# Altium PCB LPDB.PcbDoc
Units mil, origin at the board's own origin, x right, y up, seen from the top; angles counter-clockwise.
Board outline 1968.5 x 2450.79 mil, 2 copper layers (Top Layer, Bottom Layer), stack 65.792 mil thick; 34 components, 41 nets, 185 pads, 198 vias.
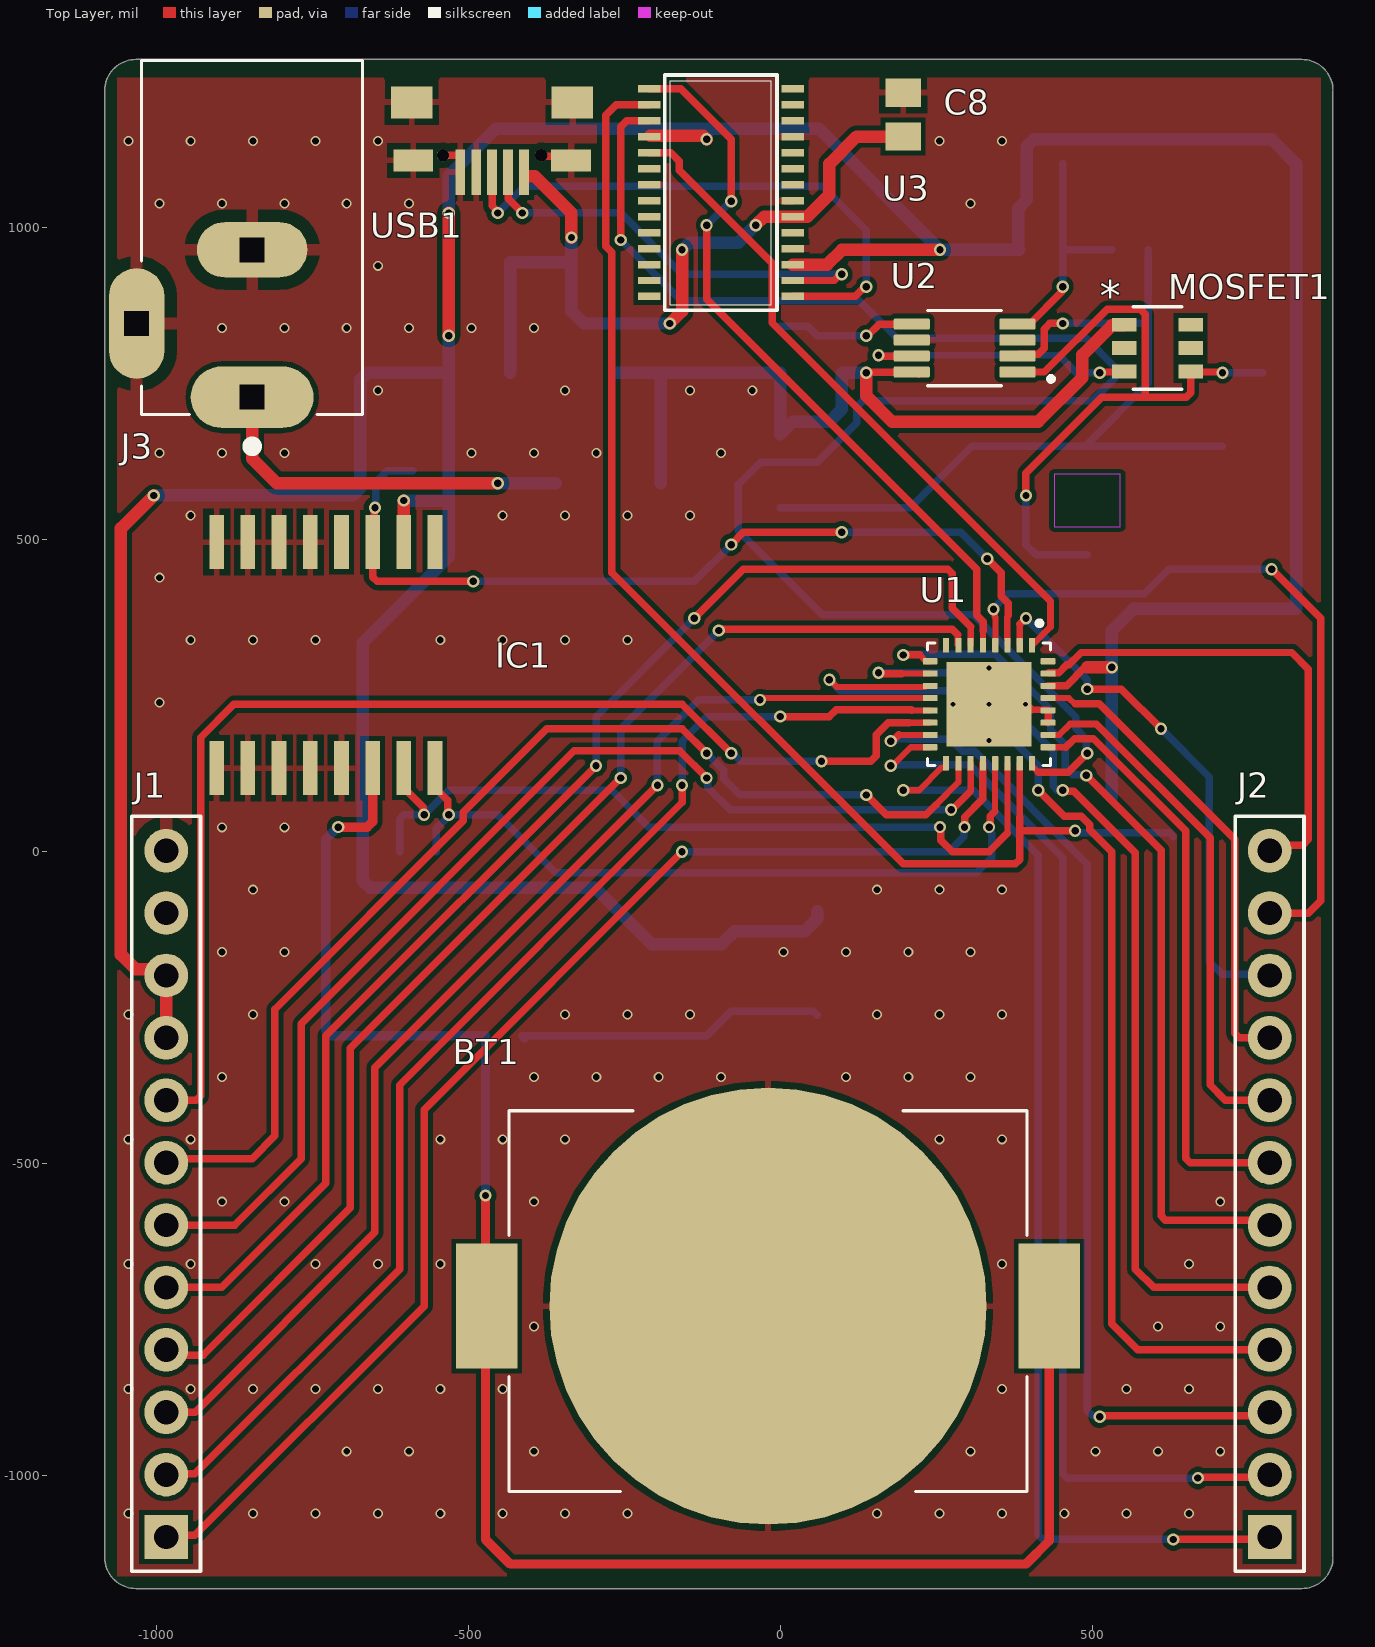
[diagram p0: Top Layer view]
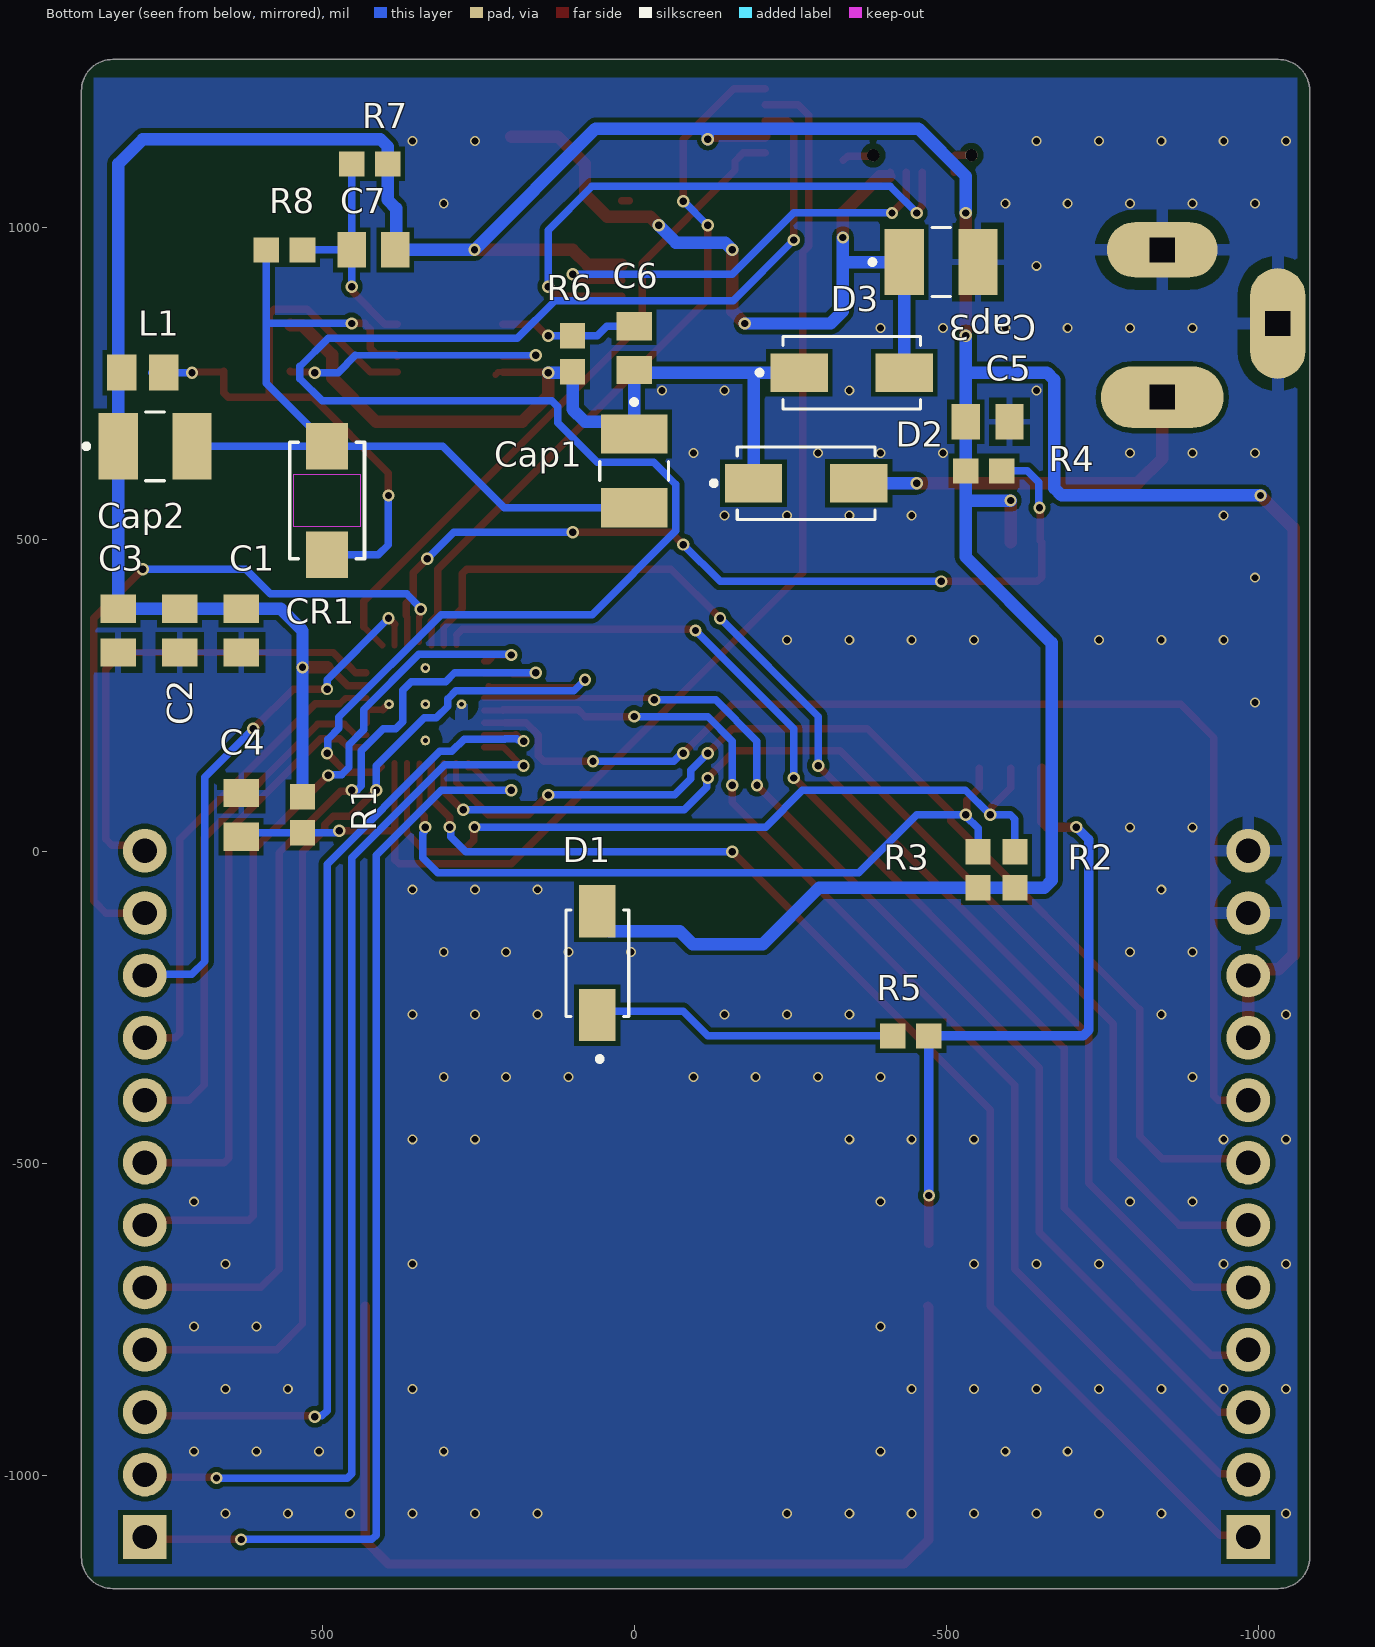
[diagram p1: Bottom Layer view, seen from below]
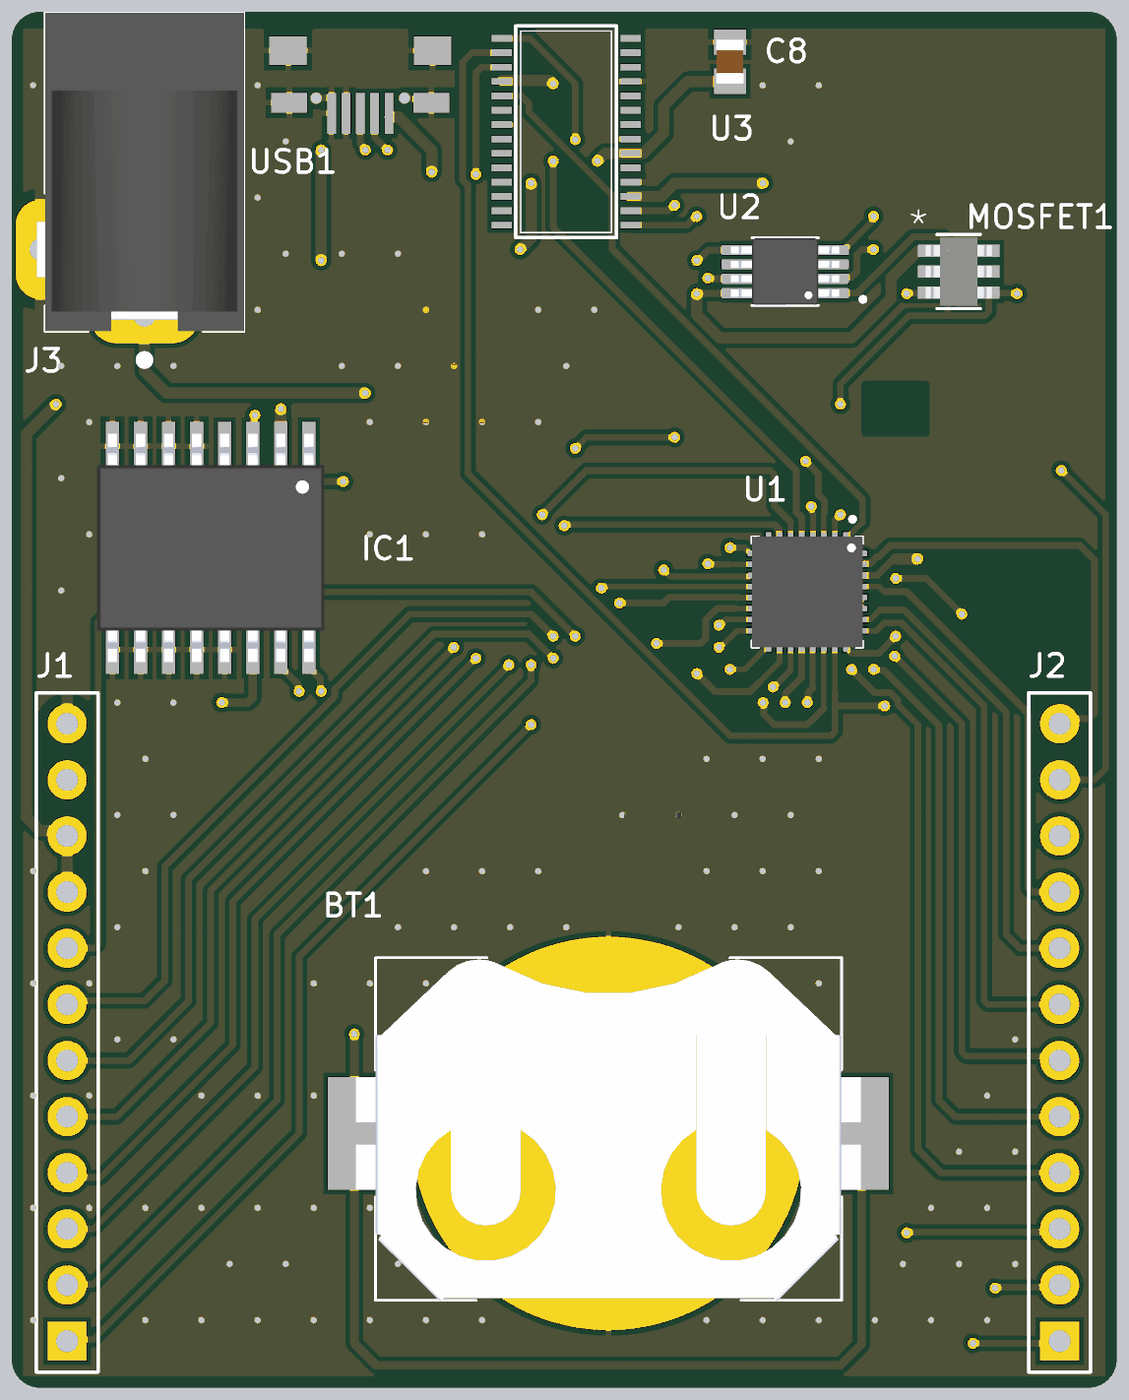
[diagram p2: 3D render of the assembled board from above, using the file's embedded part models]
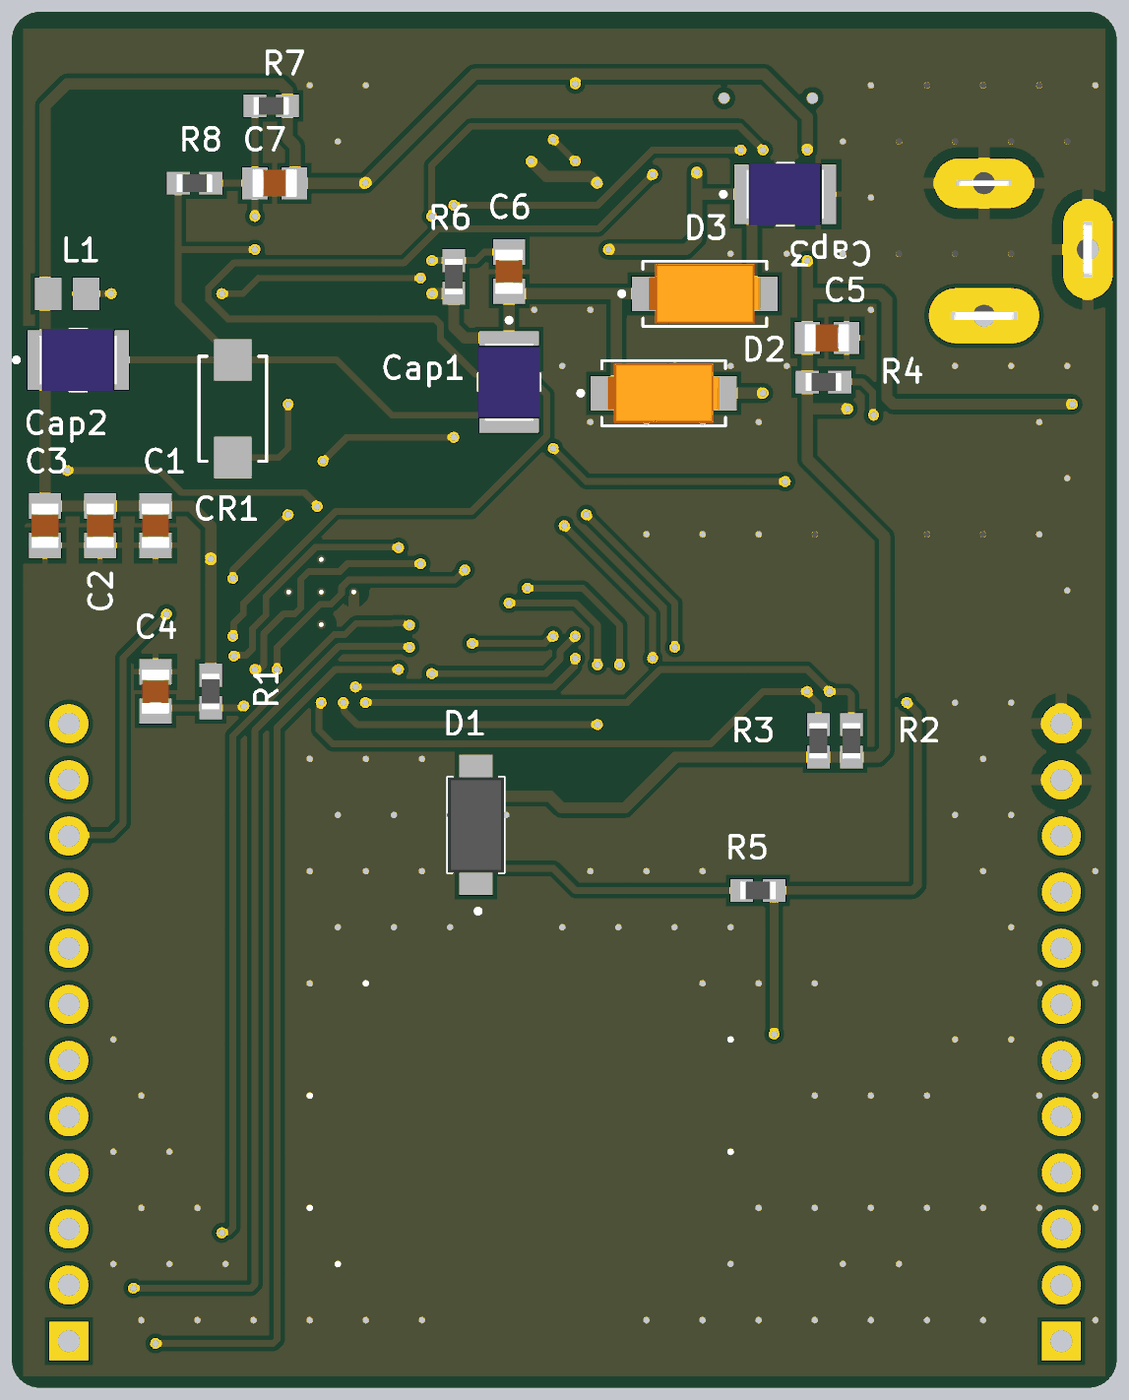
[diagram p3: 3D render of the assembled board from below, using the file's embedded part models]

## Layer stack, top to bottom
Top Solder: solder mask 0.4, Solder Resist, Dk 3.5
Top Layer: signal copper 1.4
Dielectric 1: dielectric 62.992, FR-4, Dk 3.8
Bottom Layer: signal copper 1.4
Bottom Solder: solder mask 0.4, Solder Resist, Dk 3.5

## Board outline
-1082.68,-1131.1 -1082.68,1219.69 cw(c-1032.68,1219.69) -1032.68,1269.69 835.83,1269.69 cw(c835.83,1219.69) 885.83,1219.69 885.83,-1131.1 cw(c835.83,-1131.1) 835.83,-1181.1 -1032.68,-1181.1 cw(c-1032.68,-1131.1)

## Design rules (kind name [scope] priority, off if disabled: settings)
Clearance [All] p1: gap=7.87 ignorepadtopadclearanceinfootprint=FALSE except(5: SMDPad-SMDPad)
HoleSize [All] p1: absolutevalues=TRUE maxlimit=248.03 minlimit=7.87 maxpercent=80.000 minpercent=20.000
HoleToHoleClearance [All] p1: gap=19.68 allowstackedmicrovias=TRUE
MinimumSolderMaskSliver [All] p1: minsoldermaskwidth=3.94
PolygonConnect [All] p1: thpad.connectstyle=Relief thpad.reliefconductorwidth=19.68 thpad.reliefentries=4 thpad.polygonreliefangle="90 Angle" thpad.airgapwidth=19.68 smdpad.connectstyle=Relief smdpad.reliefconductorwidth=9.84 smdpad.reliefentries=4 smdpad.polygonreliefangle="90 Angle" smdpad.airgapwidth=9.84 via.connectstyle=Direct via.reliefconductorwidth=10 via.reliefentries=4 via.polygonreliefangle="90 Angle" via.airgapwidth=10
RoutingVias [All] p1: holewidth=11.81 width=19.68 viastyle="Through Hole" minholewidth=11.81 minwidth=19.68 maxholewidth=11.81 maxwidth=19.68
SilkToSilkClearance [All] p1: silktosilkclearance=5.91
SilkToSolderMaskClearance [IsPad] p1: minsilkscreentomaskgap=3.94 clearancetoexposedcopper=TRUE
SolderMaskExpansion [All] p1: expansion=1.5 istentingtop=FALSE
Width Width_power [InNetClass('Power')] p1: maxlimit=25 minlimit=10 preferedwidth=20
Width [InNetClass('Other')] p2: maxlimit=15 minlimit=10 preferedwidth=12
25 further rules are at their usual default settings.

## Classes and differential pairs
component class "USB Bridge": C8 U3 USB1
component class RTC: BT1 C5 D1 IC1 R2 R3 R4 R5
component class Power: C6 C7 Cap1 Cap2 Cap3 CR1 D2 D3 J3 L1 MOSFET1 R6 R7 R8 U2
component class MCU: C1 C2 C3 C4 J1 J2 R1 U1

## Components (designator, comment, footprint, x,y, rotation, side; value= is the part's Value field where it differs from the comment)
BT1 "BAT-HLD-001" BAT_BAT-HLD-001 -19.68,-728.35 r180 top
C1 "Cap" Cap_0805 629.92,354.33 r90 bottom
C2 "Cap" Cap_0805 728.35,354.33 r90 bottom
C3 "Cap" Cap_0805 826.77,354.33 r90 bottom
C4 "Cap" Cap_0805 629.92,59.06 r90 bottom
C5 "Cap" Cap_0805 -566.5,688.98 r180 bottom
C6 "Cap" Cap_0805 0,807.09 r270 bottom
C7 "Cap" Cap_0805 417.76,964.57 r180 bottom
C8 "Cap" Cap_0805 196.85,1181.1 r270 top
Cap1 "Polarized_Cap" CAP_B3528 0,610.24 r270 bottom
Cap2 "Polarized_Cap" CAP_B3528 767.72,649.61 r180 bottom
Cap3 "Polarized_Cap" CAP_B3528 -492.13,944.88 r180 bottom
CR1 "SS12-E3/61T" SMA(DO-214AC)_VIS 492.13,562.73 r90 bottom
D1 "Diode" Diode_SMD 59.06,-183.82 r90 bottom
D2 "Diode" DO-214AC -275.59,590.55 r180 bottom
D3 "Diode" DO-214AC -348.82,767.72 r180 bottom
IC1 "DS3231" SO16W -728.35,314.96 r180 top
J1 "DW-12-13-T-S-827" CONN12-07-F-S-200_SAI -984.25,-1098.43 r90 top
J2 "DW-12-13-T-S-827" CONN12-07-F-S-200_SAI 784.25,-1098.42 r90 top
J3 "PJ-002B" CUI_PJ-002B -846.46,728.35 r90 top
L1 "MLZ2012N220LT000" "IND - 0805" 787.4,767.72 r0 bottom value="22 μH"
MOSFET1 "FDC5614P" TSOT23-6_419BL_ONS 604.43,807.09 r0 top
R1 "Resistor" Res_0603 531.5,59.06 r90 bottom
R2 "Resistor" Res_0603 -610.24,-28.94 r270 bottom
R3 "Resistor" Res_0603 -551.18,-28.94 r270 bottom
R4 "Resistor" Res_0603 -560.43,610.24 r180 bottom
R5 "Resistor" Res_0603 -443.5,-295.28 r0 bottom
R6 "Resistor" Res_0603 98.43,797.83 r270 bottom
R7 "Resistor" Res_0603 423.82,1102.36 r0 bottom
R8 "Resistor" Res_0603 560.43,964.57 r180 bottom
U1 "MSP430G2x53 QFN-32" MSP430G2x53_QFN 334.65,236.22 r270 top
U2 "LM3485MM" SOP65P490X110-8N 295.28,807.09 r180 top
U3 "PL2303HX" TSSOP28 -91.06,1066.73 r0 top
USB1 "USB_Socket" "MICRO QTZB5.0" -461.81,1089.17 r180 top

## Footprints (in the part's own frame and the unit in brackets; to place one, negate y for a bottom-side part, rotate by r counter-clockwise, add the part's x,y. Pads: shape width x height; smd on the part's side, far side on the other; paste and mask are expansions set on the pad)
BAT_BAT-HLD-001 [mm]
  round 17.8 smd paste-10: N-(0,0)
  rect 2.5x5.1 smd: P+(-11.45,0) P+(11.45,0)
  silkscreen extent -10.55,-7.95 10.55,7.55, body extent -11.43,-7.87 11.43,7.62, height 4.32
Cap_0805 [mm]
  rect 1.15x1.45 smd: 1(-0.889,0) 2(0.889,0)
  body extent -1,-0.62 1.01,0.63, height 0.94
CAP_B3528 [mm]
  rect 1.6x2.7 smd: 1(-1.5,0) 2(1.5,0)
  silkscreen extent -2.9,-1.4 0.38,1.4, body extent -1.75,-1.4 1.75,1.4, height 1.9
CONN12-07-F-S-200_SAI [mil]
  rect 70x70 hole 39: 1(0,0)
  round 70 hole 39: 2(100,0) 3(200,0) 4(300,0) 5(400,0) 6(500,0) 7(600,0) 8(700,0) 9(800,0) 10(900,0) 11(1000,0) 12(1100,0)
  silkscreen extent -55,-55 1155,55
CUI_PJ-002B [mm]
  oval 2.5x5 hole 1 square: 1(0,0)
  oval 2.25x4.5 hole 1 square: 2(6,0)
  oval 4.5x2.25 hole 1 square: 3(3,4.7)
  silkscreen extent -2.2,-4.5 13.7,4.5, body extent -0.7,-4.5 13.7,4.9, height 11
Diode_SMD [mm]
  rect 2.12x1.5 smd: A(2.242,0) C(-1.988,0)
  silkscreen extent -3.87,-1.28 2.29,1.28, body extent -2.44,-1.28 2.7,1.28, height 1.15
DO-214AC [mm]
  rect 2.33x1.56 smd: A(2.14,0) C(-2.14,0)
  silkscreen extent -3.85,-1.48 2.8,1.48, body extent -2.53,-1.35 2.52,1.35, height 2.37
"IND - 0805" [mm]
  rect 1.2x1.47 smd: 1(-0.86,0) 2(0.86,0)
"MICRO QTZB5.0" [mm] "MICRO QTZB5.0"
  rect 0.4x1.85 smd: 1(-1.3,0) 2(-0.65,0) 3(0,0) 4(0.65,0) 5(1.3,0)
  round 0.5 hole 0.5 paste+0 mask+0: NC1(-2,-0.685) NC2(2,-0.685)
  rect 1.625x0.9 smd: SH1(-3.213,-0.475) SH2(3.213,-0.475)
  rect 1.69x1.3 smd: SH3(-3.27,-2.835) SH6(3.27,-2.835)
MSP430G2x53_QFN [mm] "32 PIN QFN."
  rrect25% 0.6x0.25 smd mask+0: 1(-2.4,1.75) 2(-2.4,1.25) 3(-2.4,0.75) 4(-2.4,0.25) 5(-2.4,-0.25) 6(-2.4,-0.75) 7(-2.4,-1.25) 8(-2.4,-1.75) 17(2.4,-1.75) 18(2.4,-1.25) 19(2.4,-0.75) 20(2.4,-0.25) 21(2.4,0.25) 22(2.4,0.75) 23(2.4,1.25) 24(2.4,1.75)
  rrect25% 0.25x0.6 smd mask+0: 9(-1.75,-2.4) 10(-1.25,-2.4) 11(-0.75,-2.4) 12(-0.25,-2.4) 13(0.25,-2.4) 14(0.75,-2.4) 15(1.25,-2.4) 16(1.75,-2.4) 25(1.75,2.4) 26(1.25,2.4) 27(0.75,2.4) 28(0.25,2.4) 29(-0.25,2.4) 30(-0.75,2.4) 31(-1.25,2.4) 32(-1.75,2.4)
  rect 3.45x3.45 smd paste-3 mask+0: 33(0,0)
  round 0.4 hole 0.2 mask+0: 34(0,0) 35(0,1.475) 36(-1.475,0) 37(0,-1.475) 38(1.475,0)
  silkscreen extent -3.39,-2.5 2.5,2.5, body extent -2.5,-2.5 2.5,2.5, height 0.99
Res_0603 [mm]
  rect 1.04x1.02 smd: 1(-0.735,0) 2(0.735,0)
  body extent -0.8,-0.4 0.8,0.4, height 0.55
SMA(DO-214AC)_VIS [mil]
  rect 74x67 smd paste+0 mask+0: 1(-86.88,0) 2(86.87,0)
  Top Layer keep-out region: -42,-53 -42,53 42,53 42,-53
  Keep-Out Layer region: -42,-53 -42,53 42,53 42,-53
  silkscreen extent -94,-60 94,60
SO16W [mm]
  rect 0.6x2.2 smd: 1(-4.445,-4.6) 2(-3.175,-4.6) 3(-1.905,-4.6) 4(-0.635,-4.6) 5(0.635,-4.6) 6(1.905,-4.6) 7(3.175,-4.6) 8(4.445,-4.6) 9(4.445,4.6) 10(3.175,4.6) 11(1.905,4.6) 12(0.635,4.6) 13(-0.635,4.6) 14(-1.905,4.6) 15(-3.175,4.6) 16(-4.445,4.6)
  body extent -5.15,-5.16 5.15,5.16, height 2.65
SOP65P490X110-8N [mm]
  rrect25% 1.47x0.455 smd: 1(-2.15,0.975) 2(-2.15,0.325) 3(-2.15,-0.325) 4(-2.15,-0.975) 5(2.15,-0.975) 6(2.15,-0.325) 7(2.15,0.325) 8(2.15,0.975)
  silkscreen extent -3.62,-1.54 1.5,1.54, body extent -2.45,-1.5 2.45,1.5, height 1.1
TSOT23-6_419BL_ONS [mil]
  rect 39.5x22 smd paste+0 mask+0: 1(-53.25,37.4) 2(-53.25,0) 3(-53.25,-37.4) 4(53.25,-37.4) 5(53.25,0) 6(53.25,37.4)
  silkscreen extent -38,-66 38,66, body extent -59,-61 59,61, height 43
TSSOP28 [mil]
  rect 36x12 smd: 1(-119.01,155.71) 2(-119.01,130.12) 3(-119.01,104.53) 4(-119.01,78.94) 5(-119.01,53.35) 6(-119.01,27.76) 7(-119.01,2.17) 8(-119.01,-23.43) 9(-119.01,-49.02) 10(-119.01,-74.61) 11(-119.01,-100.2) 12(-119.01,-125.79) 13(-119.01,-151.38) 14(-119.01,-176.97) 15(110.74,-176.97) 16(110.74,-151.38) 17(110.74,-125.79) 18(110.74,-100.2) 19(110.74,-74.61) 20(110.74,-49.02) 21(110.74,-23.43) 22(110.74,2.17) 23(110.74,27.76) 24(110.74,53.35) 25(110.74,78.94) 26(110.74,104.53) 27(110.74,130.12) 28(110.74,155.71)
  silkscreen extent -94,-199 86,178

## Part data
BT1: "Battery Retainer Coin, 20.0mm 1 Cell SMD (SMT) Tab", Package=None, Availability=Unavailable, MP=BAT-HLD-001, Price=None
C1 C2: Capacitance="47 µF"
C3: Capacitance=100nF
C4: Capacitance="1 nF"
C5: Capacitance=1.0μF
CR1: "No Description Available", Mfr_Name=Vishay
IC1: "Real Time Clock (RTC) IC Clock/Calendar - IÂ²C, 2-Wire Serial 8-SOIC (0.154, 3.90mm Width)", Package="SOIC-16 Maxim Integrated", Availability="In Stock", Check_prices=https://www.snapeda.com/parts/DS3231/Maxim+Integrated/view-part/?ref=eda, MF="Maxim Integrated", MP=DS3231, Price=None, Purchase-URL=https://pricing.snapeda.com/search/part/DS3231/?ref=eda, SnapEDA_Link=https://www.snapeda.com/parts/DS3231/Maxim+Integrated/view-part/?ref=snap
J1 J2: "No Description Available", Mfr_Name="Samtec Inc", RefDes=RefDes, Type=Type
J3: "2.5 x 6.5 mm, 2.5 A, Horizontal, Through Hole, Dc Power Jack Connector", Package=None, Availability="In Stock", Check_prices=https://www.snapeda.com/parts/PJ-002B/CUI+Devices/view-part/?ref=eda, CUI_purchase_URL=https://www.cuidevices.com/product/interconnect/connectors/dc-power-connectors/jacks/pj-002b?utm_source=snapeda.com&utm_medium=referral&utm_campaign=snapedaBOM, MF="CUI Devices", MP=PJ-002B, Price=None, Purchase-URL=https://pricing.snapeda.com/search/part/PJ-002B/?ref=eda, SnapEDA_Link=https://www.snapeda.com/parts/PJ-002B/CUI+Devices/view-part/?ref=snap
L1: "22ÂµH Shielded Multilayer Inductor 300mA 670mOhm 0805 (2012 Metric)", Package="2012 Bourns", Availability="In Stock", Check_prices=https://www.snapeda.com/parts/MLZ2012N220LT000/TDK/view-part/?ref=eda, MF=TDK, MP=MLZ2012N220LT000, Price=None, Purchase-URL=https://pricing.snapeda.com/search/part/MLZ2012N220LT000/?ref=eda, SnapEDA_Link=https://www.snapeda.com/parts/MLZ2012N220LT000/TDK/view-part/?ref=snap
MOSFET1: "No Description Available", Mfr_Name=onsemi, RefDes=RefDes, Type=Type
R2 R3: Resistance=2.6kΩ
R4: Resistance=4.7kΩ
R5: Resistance=200Ω
U1: "QFN-32-EP(5x5) Microcontroller Units (MCUs/MPUs/SOCs) ROHS. Texas Instruments.", Package=None, Availability=Unavailable, ComponentLink1Description=LSCS, ComponentLink1URL=https://www.lcsc.com/product-detail/Microcontroller-Units-MCUs-MPUs-SOCs_Texas-Instruments-MSP430G2553IRHB32R_C27832.html, MP=MSP430G2553IRHB32R, Price=None
U2: "4.5-35V, Hysteretic Non-Synchronous PFET Buck Controller", Package="VSSOP-8 Texas Instruments", Availability="In Stock", Check_prices=https://www.snapeda.com/parts/LM3485MMX/NOPB/Texas+Instruments/view-part/?ref=eda, MF="Texas Instruments", MP=LM3485MMX/NOPB, Price=None, Purchase-URL=https://pricing.snapeda.com/search?q=LM3485MMX/NOPB&ref=eda, SnapEDA_Link=https://www.snapeda.com/parts/LM3485MMX/NOPB/Texas+Instruments/view-part/?ref=snap
U3: "USB to RS232 TSSOP28", Package=None, Availability=Unavailable, MF="Prolific Technology", MP=PL-2303HX, Price=None, SnapEDA_Link=https://www.snapeda.com/parts/PL-2303HX/Prolific%20Technology/view-part/598561/?ref=snap
C6: Parameter 1=1nF
C7: Parameter 1=100pF
C8: Parameter 1=100nF
Cap1: Parameter 1=100μF
Cap2: Parameter 1=22μF
Cap3: Parameter 1=10μF
R1: Parameter 1=10kΩ
R6: Parameter 1=240kΩ
R7: Parameter 1=33kΩ
R8: Parameter 1=20kΩ

## Via types
v1: diameter 16, hole 11, Top Layer to Bottom Layer, tented both sides, 125 vias
v2: diameter 19.68, hole 11.81, Top Layer to Bottom Layer, 73 vias

## Nets (pads, with @x,y where several pads share a name; then routed paths per layer and width w, separated by ;. In a path a pad name is that pad's centre, name@x,y a point inside that pad or via, vN(x,y) a via of type N, cw(c..) or ccw(c..) an arc to the next point about the centre after c; other vN are vias at no path point)
+3V3: C1.2 C2.2 C3.2 C5.1 C7.2 Cap2.1 D1.A IC1.2 J1.9 J1.10 L1.2 R1.2 R2.2 R3.2 R4.1 R7.1 U1.30 U3.4 U3.17 | length 7128.3
  Top Layer w12: U1.30 458.78,265.75 488.31,295.28 492.13,295.28
  Top Layer w20: v2(-1003.94,570.87) -1056.81,517.99 -1056.81,-164.92 -1032.87,-188.86 -993.82,-188.86 J1.10 ; J1.10@-991.29,-198.43 -984.25,-205.47 J1.9 ; IC1.2 v2(-603.35,562.68) ; v2(-531.5,826.77) v2(-531.5,1023.62) ; U3.4@-208.35,1147.39 -123.76,1147.39 v2(-118.11,1141.73) ; U3.17 74.98,940.94 98.6,964.57 v2(255.91,964.57) ; 492.13,295.28 v2(531.5,295.28)
  Bottom Layer w20: v2(-1003.94,570.87) -685.05,570.87 -673.33,582.58 -673.33,756 -661.61,767.72 -531.5,767.72 ; v2(-603.35,562.68) -539.68,562.68 ; v2(-531.5,826.77) -531.5,767.72 ; v2(-531.5,1023.62) -531.5,1082.68 -455.54,1158.63 -118.11,1158.63 ; v2(-118.11,1141.73) -118.11,1158.63 ; D1.A 59.06,-107.76 39.53,-127.28 -72.92,-127.28 -93.85,-148.21 -206.29,-148.21 -296.63,-57.87 R3.2 R2.2 -657.58,-57.87 -669.29,-46.16 -669.29,334.65 -531.5,472.44 -531.5,562.68 R4.1 C5.1 -531.5,767.72 ; R1.2 v2(531.5,295.28) 531.5,354.33 566.5,389.33 C1.2 C2.2 C3.2 Cap2.1 826.77,787.4 826.77,1102.36 787.4,1141.73 406.6,1141.73 394.88,1130.02 R7.1 394.88,1044.49 381.47,1031.08 381.47,965.85 C7.2 v2(255.91,964.57) 61.84,1158.63 -118.11,1158.63
+5V_USB: C8.2 Cap3.1 D3.A U3.20 USB1.1 | length 1289.2
  Top Layer w12: USB1.1 -410.63,1084.55 USB1.1@-408.76,1082.68
  Top Layer w20: USB1.1@-408.76,1082.68 -393.7,1082.68 -334.65,1023.62 v2(-334.65,984.25) ; v2(-177.17,846.46) -157.48,866.14 v2(-157.48,964.57) ; v2(-39.37,1003.94) -25.59,1017.72 U3.20 43.37,1017.72 78.74,1053.08 78.74,1102.36 ; 78.74,1102.41 122.43,1146.1 C8.2
  Bottom Layer w20: D3.A Cap3.1 -334.65,944.88 ; v2(-334.65,984.25) -334.65,944.88 ; v2(-177.17,846.46) -314.96,846.46 -334.65,866.14 -334.65,944.88 ; v2(-157.48,964.57) -145.83,976.22 -67.09,976.22 v2(-39.37,1003.94)
+VBAT: D2.A J3.1 | length 601.3
  Top Layer w20: J3.1 -846.46,629.92 -807.09,590.55 v2(-452.76,590.55)
  Bottom Layer w20: v2(-452.76,590.55) D2.A
GND: BT1.N- C1.1 C2.1 C3.1 C4.2 C5.2 C8.1 Cap3.2 IC1.5 IC1.6 IC1.7 IC1.8 IC1.9 IC1.10 IC1.11 IC1.12 IC1.13 J1.11 J1.12 J3.2 J3.3 U1.27 U1.28 U1.33 U1.34 U1.35 U1.36 U1.37 U1.38 U2.6 U3.7 U3.18 U3.21 U3.25 USB1.4 USB1.5 USB1.NC1 USB1.NC2 USB1.SH1 USB1.SH2 USB1.SH3 USB1.SH6 | length 175.5
  Top Layer w10: 402.68,227.27 U1.28@428.24,227.27
  Top Layer w12: USB1.NC2 -514.87,1116.14 -512.99,1114.27 USB1.5 ; USB1.NC1 -381.6,1114.67 -342.13,1114.67 USB1.SH1 ; U3.21@7.68,1043.31 U3.21 ; U1.35 393.73,236.22 402.68,227.27 ; U1.27 U1.28
  other v1: -1044.88,-1061.02 -844.88,-1061.02 -744.88,-1061.02 -644.88,-1061.02 -544.88,-1061.02 -444.88,-1061.02 -344.88,-1061.02 -244.88,-1061.02 155.12,-1061.02 255.12,-1061.02 355.12,-1061.02 455.12,-1061.02 555.12,-1061.02 655.12,-1061.02 -694.88,-961.02 -594.88,-961.02 -394.88,-961.02 305.12,-961.02 505.12,-961.02 605.12,-961.02 705.12,-961.02 -1044.88,-861.02 -944.88,-861.02 -844.88,-861.02 -744.88,-861.02 -644.88,-861.02 -544.88,-861.02 -444.88,-861.02 355.12,-861.02 555.12,-861.02 655.12,-861.02 -394.88,-761.02 605.12,-761.02 705.12,-761.02 -1044.88,-661.02 -944.88,-661.02 -744.88,-661.02 -644.88,-661.02 -544.88,-661.02 355.12,-661.02 655.12,-661.02 -894.88,-561.02 -794.88,-561.02 -394.88,-561.02 705.12,-561.02 -1044.88,-461.02 -944.88,-461.02 -544.88,-461.02 -444.88,-461.02 -344.88,-461.02 255.12,-461.02 355.12,-461.02 -894.88,-361.02 -394.88,-361.02 -294.88,-361.02 -194.88,-361.02 -94.88,-361.02 105.12,-361.02 205.12,-361.02 305.12,-361.02 -1044.88,-261.02 -844.88,-261.02 -344.88,-261.02 -244.88,-261.02 -144.88,-261.02 155.12,-261.02 255.12,-261.02 355.12,-261.02 -894.88,-161.02 -794.88,-161.02 5.12,-161.02 105.12,-161.02 205.12,-161.02 305.12,-161.02 -844.88,-61.02 155.12,-61.02 255.12,-61.02 355.12,-61.02 -894.88,38.98 -794.88,38.98 -994.88,238.98 -944.88,338.98 -844.88,338.98 -744.88,338.98 -544.88,338.98 -444.88,338.98 -344.88,338.98 -244.88,338.98 -994.88,438.98 -944.88,538.98 -444.88,538.98 -344.88,538.98 -244.88,538.98 -144.88,538.98 -994.88,638.98 -894.88,638.98 -794.88,638.98 -494.88,638.98 -394.88,638.98 -294.88,638.98 -94.88,638.98 -644.88,738.98 -344.88,738.98 -144.88,738.98 -44.88,738.98 -894.88,838.98 -794.88,838.98 -694.88,838.98 -594.88,838.98 -494.88,838.98 -394.88,838.98 -644.88,938.98 -994.88,1038.98 -894.88,1038.98 -794.88,1038.98 -694.88,1038.98 -594.88,1038.98 305.12,1038.98 -1044.88,1138.98 -944.88,1138.98 -844.88,1138.98 -744.88,1138.98 -644.88,1138.98 255.12,1138.98 355.12,1138.98
NetBT1_P+: BT1.P+ IC1.14 R5.1 | length 2757
  Top Layer w15: v2(-708.66,39.37) -662.13,39.37 -653.35,48.16 IC1.14 ; -472.44,-627.95 v2(-472.44,-551.18) ; BT1.P+@-470.47,-728.35 -472.44,-730.32 -472.44,-1102.36 -433.07,-1141.73 393.7,-1141.73 431.1,-1104.33 BT1.P+@431.1,-728.35
  Bottom Layer w15: v2(-708.66,39.37) -728.35,19.68 -728.35,-286.49 -719.56,-295.28 R5.1 v2(-472.44,-551.18)
NetC4_1: C4.1 R1.1 U1.23 U3.2 | length 2069.5
  Top Layer w10: 383.86,55.04 U1.23
  Top Layer w12: U3.2 -263.15,1196.85 -279.62,1180.38 -279.62,970.4 -270.18,960.96 -270.18,447.35 196.85,-19.68 376.83,-19.68 383.86,-12.66 383.86,33.26 383.86,55.04 ; 383.86,29.53 387.59,33.26 v2(472.47,33.26)
  Bottom Layer w12: v2(472.47,33.26) 474.55,33.26 477.69,30.12 R1.1 623.86,30.12 C4.1
NetC6_1: C6.1 R6.1 U2.5 | length 224.7
  Top Layer w12: v2(137.8,826.77) 139.77,826.77 158.47,845.47 U2.5
  Bottom Layer w12: C6.1 43.74,842.09 59.06,826.77 R6.1 v2(137.8,826.77)
NetC7_1: C7.1 R7.2 R8.2 U2.4 | length 377.2
  Top Layer w12: U2.4 399.41,845.47 451.29,897.35 451.29,904.04 v2(452.76,905.51)
  Bottom Layer w12: v2(452.76,905.51) C7.1 ; R7.2 C7.1 ; R8.2 C7.1
NetCap1_2: Cap1.2 Cap2.2 CR1.2 R8.1 U2.2 | length 1350.2
  Top Layer w12: U2.2 382.69,797.06 413.29,797.06 422.73,806.5 422.73,837.1 432.09,846.46 v2(452.76,846.46)
  Bottom Layer w12: Cap1.2 208.27,551.18 306.69,649.61 Cap2.2 ; v2(452.76,846.46) 589.37,846.46 ; CR1.2@492.13,653.11 589.37,750.35 589.37,846.46 ; R8.1 589.37,846.46
NetCR1_1: CR1.1 L1.1 MOSFET1.4 U2.1 | length 1069.2
  Top Layer w12: U2.1 423,768.7 523.67,869.36 576.68,869.36 584.8,861.23 584.8,728.35 ; v2(393.7,570.87) 393.7,606.75 515.3,728.35 584.8,728.35 ; MOSFET1.4 657.68,735.38 650.65,728.35 584.8,728.35 ; MOSFET1.4@658.67,768.7 707.68,768.7 v2(708.66,767.72)
  Bottom Layer w12: v2(393.7,570.87) 393.7,492.13 409.97,475.86 CR1.1 ; v2(708.66,767.72) L1.1@773.23,767.72
NetD1_C: D1.C R5.2 | length 499.9
  Bottom Layer w12: R5.2@-409.35,-300.5 R5.2 -118.11,-295.28 -78.74,-255.91 52.87,-255.91 D1.C
NetIC1_3: IC1.3 R4.2 U1.3 | length 1408.8
  Top Layer w10: 363.74,376.18 363.74,340.19 364.09,339.84 364.09,330.79 U1.3
  Top Layer w12: v2(-649.61,551.18) -651.08,549.71 -651.08,498.33 IC1.3 -653.35,440.1 -646.32,433.07 v2(-492.13,433.07) ; v2(-78.75,492.12) -59.06,511.81 v2(98.43,511.81) ; v2(331.61,469.41) 354.33,446.69 354.33,409.51 365.49,398.35 365.49,378.7
  Bottom Layer w12: v2(-649.61,551.18) -648.14,552.65 -648.14,592.02 -629.92,610.24 R4.2 ; v2(-492.13,433.07) -137.8,433.07 v2(-78.75,492.12) ; v2(98.43,511.81) 289.21,511.81 v2(331.61,469.41)
NetIC1_15: IC1.15 R2.1 U1.22 | length 1308.2
  Top Layer w10: 363.98,29.34 U1.22@363.98,141.54
  Top Layer w12: IC1.15 -603.35,102.36 -572.34,71.35 -572.34,60.53 v2(-570.87,59.06) ; v2(255.91,39.37) 257.38,37.9 257.38,18.21 275.4,0.19 334.83,0.19 363.98,29.34
  Bottom Layer w12: R2.1 -610.24,52.03 -603.21,59.06 v2(-570.87,59.06) ; v2@-569.83,61.35 -568.14,61.35 -531.07,98.43 -269.76,98.43 -210.71,39.37 v2(255.91,39.37)
NetIC1_16: IC1.16 R3.1 U1.21 | length 1226.6
  Top Layer w10: 344.11,64.77 U1.21@344.11,141.35
  Top Layer w12: IC1.16 -553.35,102.36 -532.97,81.98 -532.97,60.53 v2(-531.5,59.06) ; v2(334.65,39.37) 336.12,40.84 336.12,56.78 344.11,64.77
  Bottom Layer w12: R3.1 -551.18,37.29 -531.5,56.98 v2(-531.5,59.06) -452.76,59.06 -359.7,-34 314.5,-34 338.68,-9.82 338.68,29.51 336.12,32.07 336.12,37.9 v2(334.65,39.37)
NetJ1_1: J1.1 U1.20 | length 2058
  Top Layer w12: J1.1 -981.59,-1095.76 -938.28,-1095.76 -570.87,-728.35 -570.87,-413.39 v2(-157.48,0) ; v2(295.28,39.37) 295.28,55.15 324.8,84.68 U1.20
  Bottom Layer w12: v2(-157.48,0) 269.76,0 293.81,24.05 293.81,37.9 v2(295.28,39.37)
NetJ1_2: J1.2 U1.13 | length 1963
  Top Layer w10: 210.35,226.38 U1.13
  Top Layer w12: J1.2 -983.16,-997.34 -938.28,-997.34 -610.24,-669.29 -610.24,-374.02 -157.48,78.74 v2(-157.48,106.49) ; v2(0,216.54) 78.74,216.54 89.39,227.19 209.54,227.19 210.35,226.38
  Bottom Layer w12: v2(-157.48,106.49) -157.48,177.17 -118.11,216.54 v2(0,216.54)
NetJ1_3: J1.3 U1.12 | length 1894.5
  Top Layer w10: v2@-27.45,246.06 U1.12
  Top Layer w12: J1.3 -937.8,-898.43 -649.61,-610.24 -649.61,-346.27 v2(-196.85,106.49) ; v2(-32.44,243.15) -30.36,243.15 v2@-27.45,246.06
  Bottom Layer w12: v2(-196.85,106.49) -196.85,177.17 -130.87,243.15 v2(-32.44,243.15)
NetJ1_4: J1.4 U1.7 | length 1970
  Top Layer w10: U1.7@284.54,331.6 284.54,347.55
  Top Layer w12: J1.4 -975.59,-807.09 -925.2,-807.09 -688.98,-570.87 -688.98,-314.96 v2(-255.91,118.11) ; v2(-98.43,354.33) -96.35,354.33 -94.28,356.39 275.7,356.39 284.54,347.55
  Bottom Layer w12: v2(-255.91,118.11) -255.91,196.85 v2(-98.43,354.33)
NetJ1_5: J1.5 U1.6 | length 2051.3
  Top Layer w10: U1.6 305.12,360.52
  Top Layer w12: J1.5 -895.28,-698.43 -728.35,-531.5 -728.35,-295.28 v2(-295.28,137.8) ; v2(-137.8,374.02) -59.06,452.76 268.56,452.76 275.59,445.73 275.59,390.05 305.12,360.52
  Bottom Layer w12: v2(-295.28,137.8) -295.28,216.54 v2(-137.8,374.02)
NetJ1_6: J1.6 U1.19 | length 1835
  Top Layer w10: 304.04,95.92 305.12,97 U1.19
  Top Layer w12: J1.6 -874.02,-598.43 -767.72,-492.13 -767.72,-275.59 -330.61,161.51 -161.51,161.51 v2(-118.11,118.11) ; v2(273.71,67.12) 275.23,67.12 304.04,95.92
  Bottom Layer w12: v2(-118.11,118.11) -116.64,116.64 -116.64,103.39 -80.37,67.12 v2(273.71,67.12)
NetJ1_7: J1.7 U1.18 | length 1801.9
  Top Layer w10: 249.99,75.53 285.43,110.97 U1.18
  Top Layer w12: J1.7 -977.95,-492.13 -846.46,-492.13 -810,-455.67 -810,-252.99 -507.78,49.23 -507.78,63.09 -374.02,196.85 -157.48,196.85 v2(-118.11,157.48) ; v2(137.8,90.83) 169.57,59.06 233.52,59.06 249.99,75.53
  Bottom Layer w12: v2(-118.11,157.48) -90.9,130.27 -90.9,116.57 -65.16,90.83 v2(137.8,90.83)
NetJ1_8: J1.8 U1.14 | length 1907.1
  Top Layer w10: 206.69,206.69 U1.14
  Top Layer w12: J1.8 -936.06,-398.43 -929.03,-391.4 -929.03,182.91 -875.72,236.22 -157.48,236.22 v2(-78.74,157.48) ; v2(65.98,144.72) 144.72,144.72 153.45,153.45 153.45,186.99 173.34,206.88 197.86,206.88 198.05,206.69 206.69,206.69
  Bottom Layer w10: v2(-78.74,157.48) v2@-76.12,157.48
  Bottom Layer w12: v2@-76.12,157.48 -63.36,144.72 v2(65.98,144.72)
NetJ2_1: J2.1 U1.17 | length 1815.4
  Top Layer w10: v2(196.85,98.43) 222.44,98.43 258.94,134.92 265.67,134.92 265.75,135 U1.17
  Top Layer w12: v2(629.92,-1102.36) 780.31,-1102.36 J2.1
  Bottom Layer w12: v2(196.85,98.43) 309.13,98.43 413.39,-5.83 413.39,-1095.33 420.42,-1102.36 v2(629.92,-1102.36)
NetJ2_2: J2.2 U1.16 | length 1726.3
  Top Layer w10: v2@179.79,137.8 209.31,167.32 U1.16
  Top Layer w12: v2(669.29,-1003.94) 670.76,-1002.47 780.21,-1002.47 J2.2
  Bottom Layer w12: v2@184.47,139.27 303.4,139.27 452.76,-10.09 452.76,-996.91 459.79,-1003.94 v2(669.29,-1003.94)
  other v2: 177.17,137.8
NetJ2_3: J2.3 U1.15 | length 1641.9
  Top Layer w10: v2(177.17,177.17) v2@179.79,177.17 ; 189.63,187.01 U1.15
  Top Layer w12: v2@179.79,177.17 189.63,187.01 ; v2(511.81,-905.51) 513.28,-904.04 778.64,-904.04 J2.3
  Bottom Layer w10: v2(177.17,177.17) 179.02,179.02 v2@186.26,179.02
  Bottom Layer w12: v2@186.26,179.02 188.44,181.2 206.67,181.2 207.67,180.2 272.56,180.2 292.06,160.7 311.49,160.7 492.13,-19.94 492.13,-895.76 500.4,-904.04 510.34,-904.04 v2(511.81,-905.51)
NetJ2_4: J2.4 U1.11 | length 1788.6
  Top Layer w10: v2(78.74,275.59) 90.39,263.94 231.61,263.94 U1.11@233.35,265.67
  Top Layer w12: v2(413.39,98.43) 454.84,56.98 482.29,56.98 496.19,43.08 496.19,35.31 531.5,0 531.5,-756.93 572.99,-798.43 J2.4
  Bottom Layer w12: v2(78.74,275.59) 96.36,257.97 285.58,257.97 298.32,245.23 298.32,233.17 317.02,214.47 336.71,214.47 413.39,137.8 v2(413.39,98.43)
NetJ2_5: J2.5 U1.10 | length 1586.2
  Top Layer w10: 194.5,285.43 U1.10
  Top Layer w12: v2(157.48,286.65) 158.7,285.43 194.5,285.43 ; v2(452.76,98.43) 454.23,96.95 470.42,96.95 569.11,-1.74 569.11,-669.29 598.25,-698.43 J2.5 J2.5@774.02,-708.66
  Bottom Layer w12: v2(157.48,286.65) 287.86,286.65 301.97,272.54 357.38,272.54 370.97,258.95 370.97,208.32 382.25,197.04 401.93,197.04 437.1,161.87 437.1,105.45 444.13,98.43 v2(452.76,98.43)
NetJ2_6: J2.6 U1.9 | length 1397.2
  Top Layer w10: 223.33,315.21 233.43,305.12 U1.9
  Top Layer w12: v2(196.85,315.21) 223.33,315.21 ; v2@491.8,120.67 610.24,2.23 610.24,-583.52 617.27,-590.55 776.38,-590.55 J2.6
  Bottom Layer w12: v2@198.93,315.21 v2(196.85,315.21) 197.68,316.04 344.83,316.04 433.07,227.8 433.07,195.24 456.98,171.34 456.98,135.43 468.79,123.61 488.86,123.61 v2(490.33,122.14)
NetJ2_7: J2.7 U1.25 | length 949.9
  Top Layer w10: U1.25 457.67,167.32
  Top Layer w12: 457.67,167.32 471.55,181.2 501.95,181.2 649.61,33.54 649.61,-491.4 656.64,-498.43 J2.7
NetJ2_8: J2.8 U1.26 | length 844.3
  Top Layer w10: U1.26 429.21,187.09 447.25,187.09 464.73,204.56
  Top Layer w12: 464.73,204.56 506.69,204.56 688.98,22.28 688.98,-374.02 713.39,-398.43 J2.8
NetJ2_9: J2.9 U1.29 | length 763.1
  Top Layer w10: U1.29 462.6,246.06 472.44,236.22
  Top Layer w12: 472.44,236.79 511.24,236.79 728.35,19.69 728.35,-291.4 735.38,-298.43 J2.9
NetJ2_10: J2.10 U1.2 | length 872.5
  Top Layer w10: U1.2 383.86,364.17
  Top Layer w12: 383.86,364.17 v2(393.7,374.02) ; v2(492.13,260.5) 546.58,260.5 v2(610.24,196.85) ; J2.10 J2.10@799.95,-198.43
  Bottom Layer w12: v2(393.7,374.02) 492.13,275.59 v2(492.13,260.5) ; v2(610.24,196.85) 687.86,119.23 687.86,-176.05 708.66,-196.85 782.68,-196.85 J2.10
NetJ2_11: J2.11 U1.4 | length 1179.2
  Top Layer w10: v2(341.77,388.53) 343.62,386.67 343.62,376.81 ; U1.4@344.87,336.52 344.87,375.57
  Top Layer w12: J2.11 846.46,-98.43 866.33,-78.55 866.33,373.83 v2(787.4,452.76)
  Bottom Layer w12: v2(341.77,388.53) 341.77,390.38 364.77,413.39 583.17,413.39 622.54,452.76 v2(787.4,452.76)
NetJ2_12: J2.12 U1.31 | length 788.3
  Top Layer w12: U1.31@430.02,286.32 445.97,286.32 459.21,299.56 462.65,299.56 482.24,319.15 819.84,319.15 846.46,292.53 846.46,19.68 837.25,10.48 793.16,10.48 J2.12
  Bottom Layer w12: J2.12 J2.12@787.59,4.91
NetMOSFET1_3: MOSFET1.3 U2.7 | length 459.6
  Top Layer w12: v2(157.48,795.43) 158.62,794.29 U2.7 ; v2(511.81,767.72) 512.8,768.7 550.2,768.7 MOSFET1.3
  Bottom Layer w10: v2(157.48,795.43) 446.69,795.43
  Bottom Layer w12: 446.69,795.43 474.41,767.72 v2(511.81,767.72)
NetU1_1: U1.1 U3.5 | length 1088.4
  Top Layer w10: U1.1 433.07,360.24
  Top Layer w12: U3.5 -175.2,1120.08 -161.67,1106.55 -161.67,1091.71 -12.69,942.73 -12.69,847.25 433.07,401.49 433.07,360.24
NetU1_5: U1.5 U3.1 | length 1175.5
  Top Layer w10: 323.99,352.7 324.8,351.89 U1.5
  Top Layer w12: U3.1 -159.45,1222.44 -78.74,1141.73 v2(-78.74,1042.32) ; v2(-118.11,1003.94) -118.11,885.59 314.96,452.52 314.96,378.78 324.99,368.75 324.99,353.7
  Bottom Layer w12: v2(-118.11,1003.94) -117.62,1003.94 -79.23,1042.32 v2(-78.74,1042.32)
NetU1_24: U1.24 U3.3 | length 2721.9
  Top Layer w10: U1.24@404.62,135.92 413.39,127.16
  Top Layer w12: v2(-255.91,980.22) -255.91,1161.42 -246.06,1171.26 U3.3 ; 413.39,127.16 461.8,127.16 v2(492.13,157.48)
  Bottom Layer w12: v2(-255.91,980.22) -158.65,882.97 126.8,882.97 187.03,822.74 490.33,822.74 535.53,777.54 535.53,757.89 500.06,722.43 131.87,722.43 122.3,712.85 122.3,687.32 58.9,623.92 -31.53,623.92 -67.02,588.42 -67.02,513.94 67.33,379.58 309.39,379.58 473.24,215.74 473.24,197.65 490.66,180.24 490.66,158.95 v2(492.13,157.48)
NetU3_15: U3.15 USB1.3 | length 921.6
  Top Layer w12: USB1.3 -461.81,1034.76 -452.76,1025.7 v2(-452.76,1023.62) ; U3.15 119.97,889.76 135.72,905.51 v2(137.8,905.51)
  Bottom Layer w12: v2(-452.76,1023.62) -410.34,1066.04 67.75,1066.04 137.8,996 v2(137.8,905.51)
NetU3_16: U3.16 USB1.2 | length 710.4
  Top Layer w12: USB1.2 -436.22,1046.46 v2(-413.39,1023.62) ; U3.16 86.5,915.35 96.35,925.2 v2(98.43,925.2)
  Bottom Layer w12: v2(-413.39,1023.62) -255.91,1023.62 -157.48,925.2 v2(98.43,925.2)
VIN: C6.2 Cap1.1 D2.C D3.C MOSFET1.1 R6.2 U2.8 | length 1383.1
  Top Layer w10: U2.8 217.58,768.7 U2.8@222.03,764.25
  Top Layer w12: v2(137.8,767.72) 138.29,768.21 210.14,768.21 U2.8
  Top Layer w20: v2(137.8,767.72) 137.8,730.53 179.34,688.98 413.39,688.98 484.09,759.69 484.09,796.03 531.56,843.49 550.18,843.49 MOSFET1.1
  Bottom Layer w20: D3.C -191.34,767.72 ; D2.C -191.34,767.47 C6.2@-8.98,767.47 ; C6.2@0,767.47 Cap1.1 19.69,688.98 78.74,688.98 98.43,708.66 98.43,766.54 99.61,767.72 v2(137.8,767.72)
pads on no net: IC1.1 IC1.4 MOSFET1.2 MOSFET1.5 MOSFET1.6 U1.8 U1.32 U2.3 U3.6 U3.8 U3.9 U3.10 U3.11 U3.12 U3.13 U3.14 U3.19 U3.22 U3.23 U3.24 U3.26 U3.27 U3.28

## Polygon pours and split planes (outlines as drawn)
GND on Bottom Layer "GND_L02_P001" (solid, remove dead copper, pour order 1): -1062.99,1240.16 866.14,1240.16 866.14,-1161.42 -1062.99,-1161.42
GND on Top Layer "GND_L01_P000" (solid, remove dead copper, pour order 0): -1062.99,1240.16 866.14,1240.16 866.14,-1161.42 -1062.99,-1161.42

## Silkscreen, mask and mechanical layers (free items; w line width, h text height)
Mechanical 1:
  lines w7.87: -1082.68,-1131.1 ccw(c-1032.68,-1131.1) -1032.68,-1181.1 835.83,-1181.1 ccw(c835.83,-1131.1) 885.83,-1131.1 885.83,1219.69 ccw(c835.83,1219.69) 835.83,1269.69 -984.25,1269.69 -1032.68,1269.69 ccw(c-1032.68,1219.69) -1082.68,1219.69 -1082.68,-1131.1

## Text inside footprints (layer, text, board x,y; h text height)
MOSFET1: Top Overlay "*" at 511.81,866.14 h50; Mechanical 13 "*" at 573.43,815.09 h50
USB1: Mechanical 13 "PCB EDGE" at -371.81,1267.72 h20 r180